# EAGLE board Arduino WaterMeterBoardv1r0 (EAGLE 6.5.0)
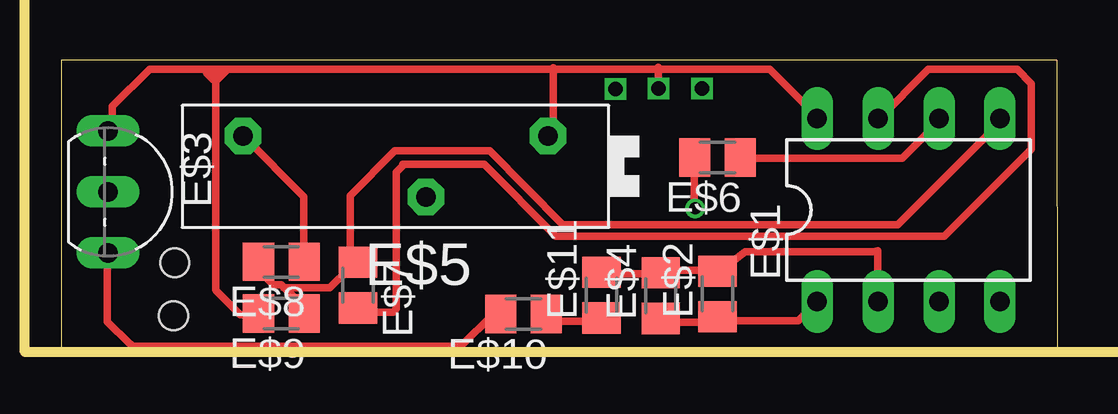
[diagram p0: board, top side]
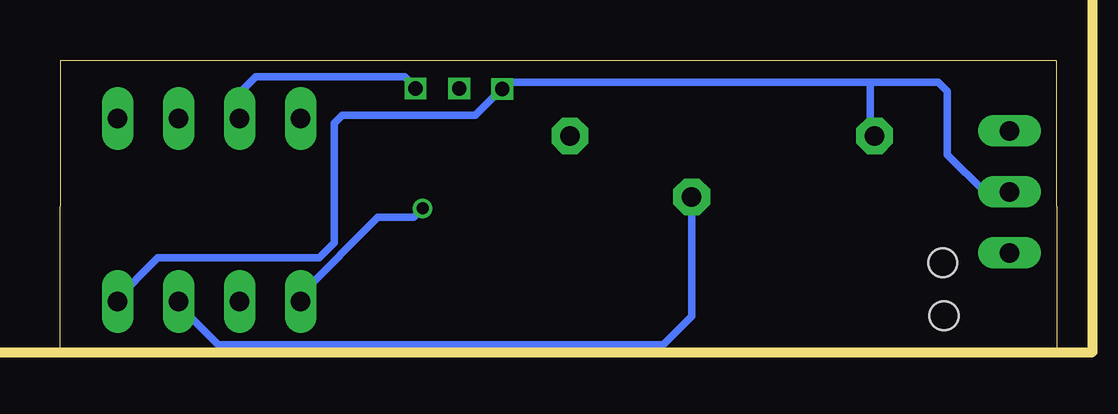
[diagram p1: board, bottom side, seen from below]

Size 41.57 x 12.2 mm. Coordinates in mm from the lower left corner, seen from the top.
Outline: 0,0 41.57,0 41.54,12.2
Outline: 0.06,12.18 0.04,0.03
Outline: 41.54,12.19 0.06,12.19
Copper layers (1*16): Top 0.035mm / dielectric 1.5mm / Bottom 0.035mm
Design rules "default": minimum track width 0.1mm, minimum drill 0.3mm, track to track 6mil, track to pad 6mil, pad to pad 6mil, via to via 6mil, smd to smd 6mil, copper to edge 10mil, drill to drill 10mil, minimum pad ring 10mil, minimum via ring 6mil, stop-mask expansion 2mil, vias tented up to drill 25mil, thermal gap 10mil
Net classes: 0 default: width 0.003 mm, drill 0.254 mm, clearance 0.152 mm
Holes 1.2 mm at 4.73,1.54 4.79,3.75
Milling: 4 lines

## Footprints (pad centres in the part's own frame; a part is rotated, then mirrored left to right if it is on the bottom)
DIL08 = drill 0.813 long: 1 -3.81,-3.81; 2 -1.27,-3.81; 3 1.27,-3.81; 4 3.81,-3.81; 5 3.81,3.81; 6 1.27,3.81; 7 -1.27,3.81; 8 -3.81,3.81
M0805 = smd 1.3 x 1.6: 1 -0.95,0; 2 0.95,0
TO92-EBC-OVAL = drill 0.813 long: B 0,-1.27; C 2.54,-1.27; E -2.54,-1.27
PT-SPIN = drill 0.813 pad 1.524 octagon: 1 -6.35,-1.27; 2 6.35,-1.27; 3 -1.27,1.27

## Placement (x,y rotation side)
E$1  [DIL08]  35.36,5.96 0 top
E$2  [M0805]  27.39,2.46 90 top
E$3  [TO92-EBC-OVAL]  3.27,6.71 270 top
E$4  [M0805]  25.03,2.39 90 top
E$5  [PT-SPIN]  13.98,7.77 180 top
E$6  [M0805]  27.39,8.15 180 top
E$7  [M0805]  12.41,2.82 270 top
E$8  [M0805]  9.22,3.8 180 top
E$9  [M0805]  9.22,1.64 180 top
E$10  [M0805]  19.31,1.61 180 top
E$11  [M0805]  22.56,2.41 90 top

## Library data of the parts
E$1 = ref-packages
E$2-E$4 E$6-E$11 = adafruit
E$5 = rcl

## Tracks (layer width: path | path; a pad name or v marks a point on that pad's centre or on a via)
S$1
  Top 0.305: 34.08,2.19 34.08,4.25 33.85,4.22 28.56,4.22 27.43,3.36
S$2
  Top 0.305: 27.79,1.34 30.76,1.34 31.56,2.15
S$3
  Top 0.305: 2.18,9.27 2.18,10.27 3.74,11.83 29.56,11.83 31.66,9.73
S$4
  Bottom 0.305: 1.95,6.71 3.04,6.71 4.59,8.26 4.59,10.89 4.98,11.28
S$5  (via drill 0.6)
  other vias: 26.75,11.02
S$6  (via drill 0.6)
  other vias: 24.93,11.02
S$7  (via drill 0.6)
  other vias: 23.14,10.99
S$8
  Bottom 0.305: 5,11.28 22.96,11.28 23.17,11.07
S$9
  Top 0.305: 24.93,11.9 24.93,11.02 24.99,10.97
S$10
  Bottom 0.305: 23.19,11.02 23.19,10.97 24.26,9.9 29.81,9.9 30.15,9.56 30.15,4.58 30.77,3.96 37.49,3.96 39.31,2.14
S$11
  Top 0.305: 27.21,3.21 27.47,3.48
S$12
  Top 0.305: 1.98,4.04 1.98,1.31 2.91,0.37
S$13
  Top 0.305: 20.55,11.89 20.55,9.16 20.29,8.9
S$14
  Bottom 0.305: 7.81,11.25 7.81,9.05 7.66,8.9
S$15
  Bottom 0.305: 15.25,6.5 15.25,1.53 16.44,0.34 34.98,0.34 36.78,2.13
S$16
  Top 0.305: 28.48,8.11 35.09,8.11 36.74,9.76
S$17
  Bottom 0.305: 31.51,2.06 31.51,2.47 28.33,5.64 26.83,5.64 26.53,5.94
S$18  (via drill 0.5)
  other vias: 26.46,6.02
S$19
  Top 0.305: 26.42,6.09 26.42,8.19 26.46,8.22
S$20
  Top 0.305: 8.26,3.62 8.26,3.46 8.88,2.84 9.22,2.84 9.88,2.19
S$21
  Top 0.305: 10.16,3.9 10.16,6.52 7.7,8.98
S$22
  Top 0.305: 8.23,1.59 7.51,1.59 6.51,2.59
S$23
  Top 0.305: 6.48,2.62 6.48,11.31 6.92,11.75 6.14,11.75 6.11,11.78 6.11,11.65 6.39,11.37 6.39,11.5 6.54,11.65
S$24
  Top 0.305: 9.33,2.72 11.25,2.72 12.09,3.56 12.09,6.55 13.96,8.42 17.91,8.42 20.95,5.33 33.97,5.33
S$25
  Top 0.305: 12.31,1.7 13.88,1.7 14.02,1.83 14.02,7.53 14.29,7.8
S$26
  Top 0.305: 14.27,7.85 17.68,7.85 20.67,4.86 36.85,4.86 40.48,8.49 40.48,11.22 39.88,11.81 36.18,11.81 34.08,9.72
S$27
  Bottom 0.305: 34.16,9.76 34.16,10.77 33.41,11.51 27.21,11.51 26.72,11.03
S$28
  Top 0.305: 33.93,5.34 34.91,5.34 39.28,9.72
S$29
  Top 0.305: 27.11,3.44 25.24,3.44 25.22,3.41
S$30
  Top 0.305: 27.55,1.28 24.96,1.28 24.93,1.31
S$31
  Top 0.305: 22.7,3.31 25.17,3.31 25.22,3.36
S$32
  Top 0.305: 22.6,1.31 20.42,1.31 20.16,1.57
S$33
  Top 0.305: 18.26,1.62 18.06,1.62 16.71,0.27 3.03,0.27 2.77,0.53